# Altium PCB 20230531.PcbDoc
Units mm, origin at the board's own origin, x right, y up, seen from the top; angles counter-clockwise.
Board outline 68.58 x 63.5 mm, 2 copper layers (Top Layer, Bottom Layer); 32 components, 19 nets, 73 pads, 0 vias.
Unrouted connection lines stored in the file: 51.
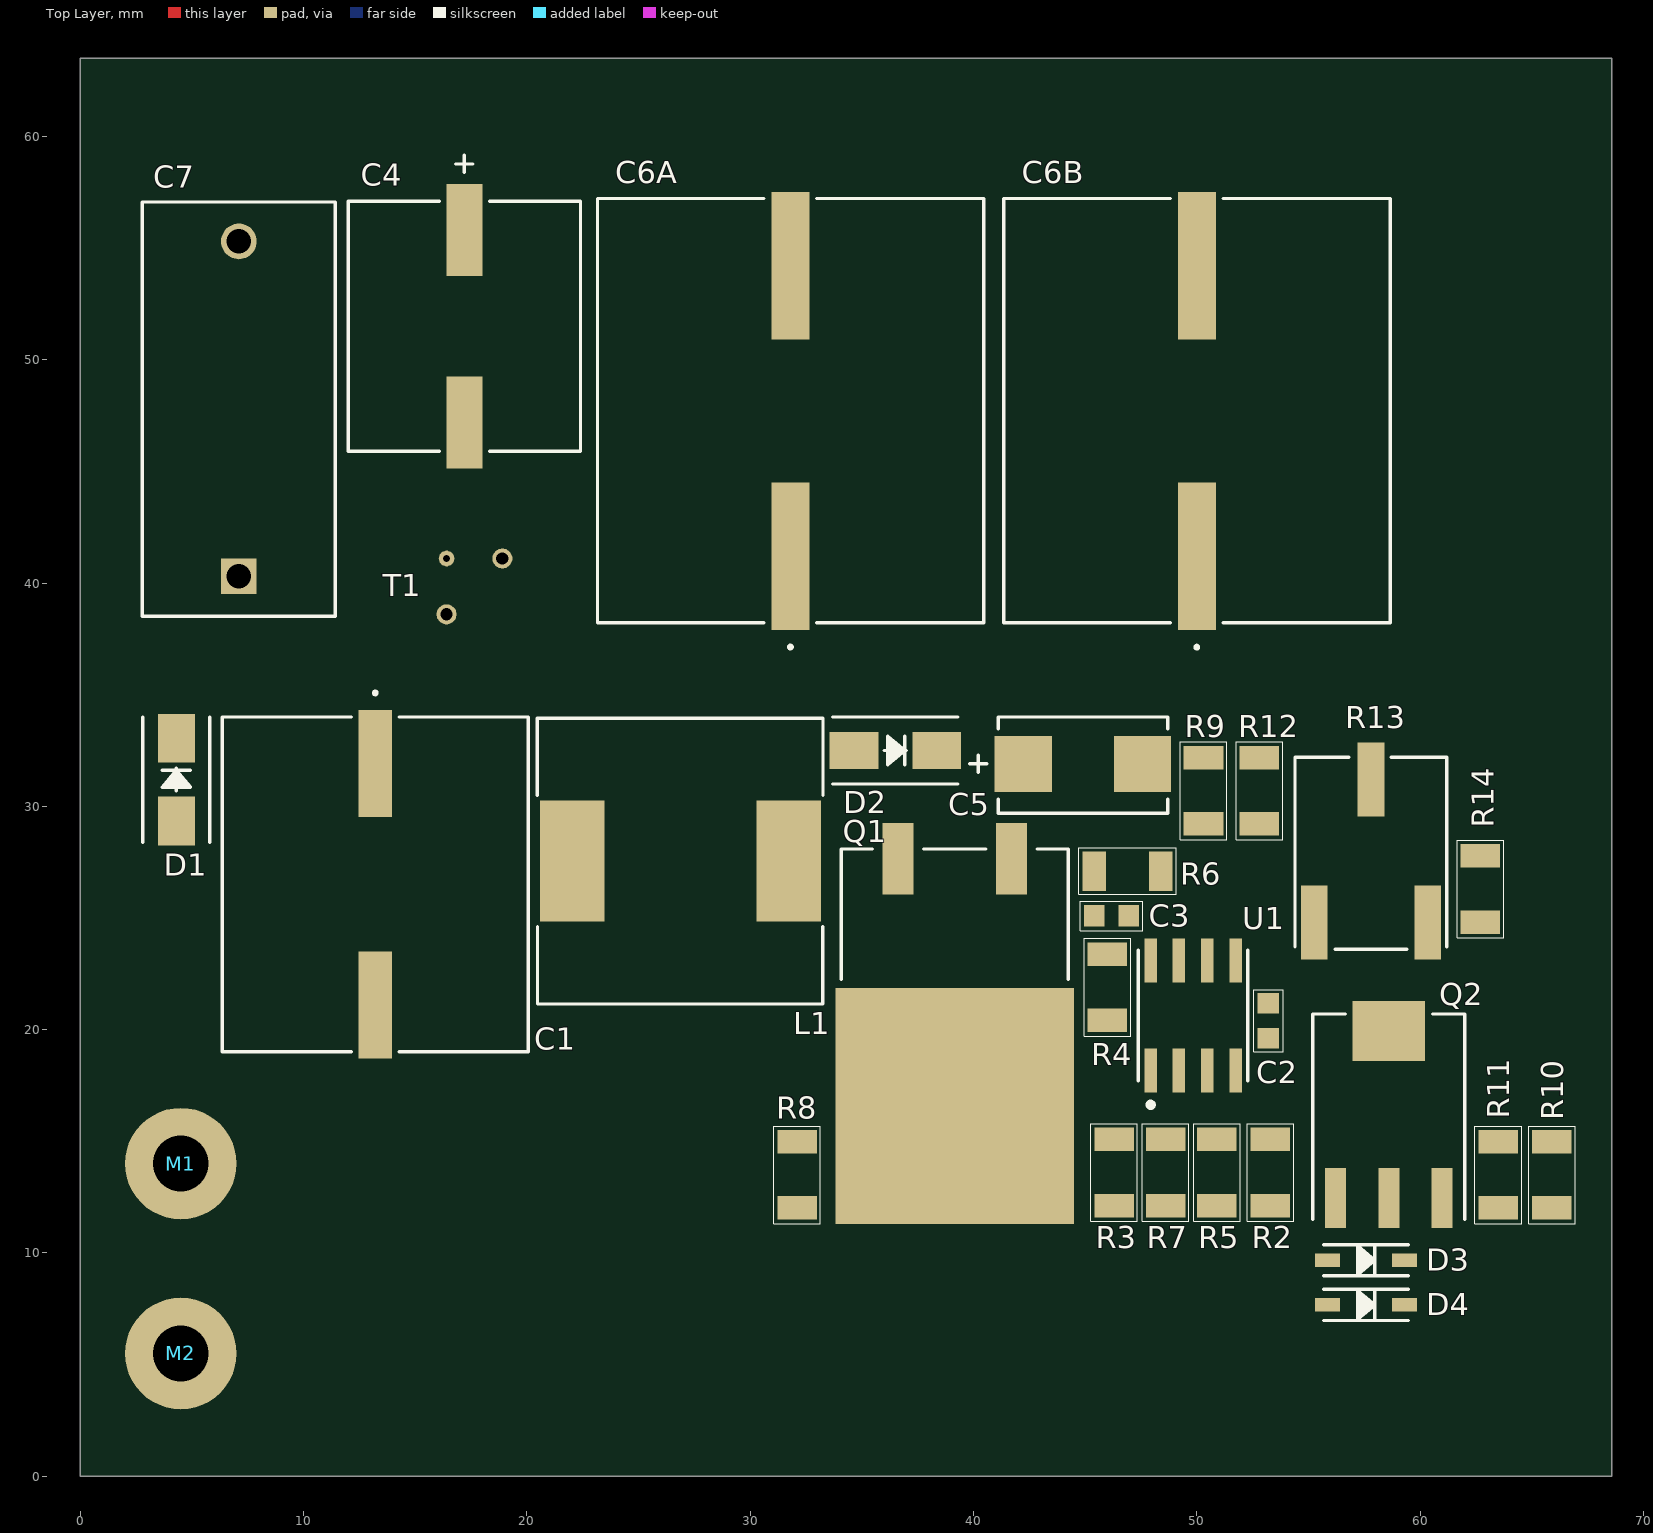
[diagram p0: Top Layer view]
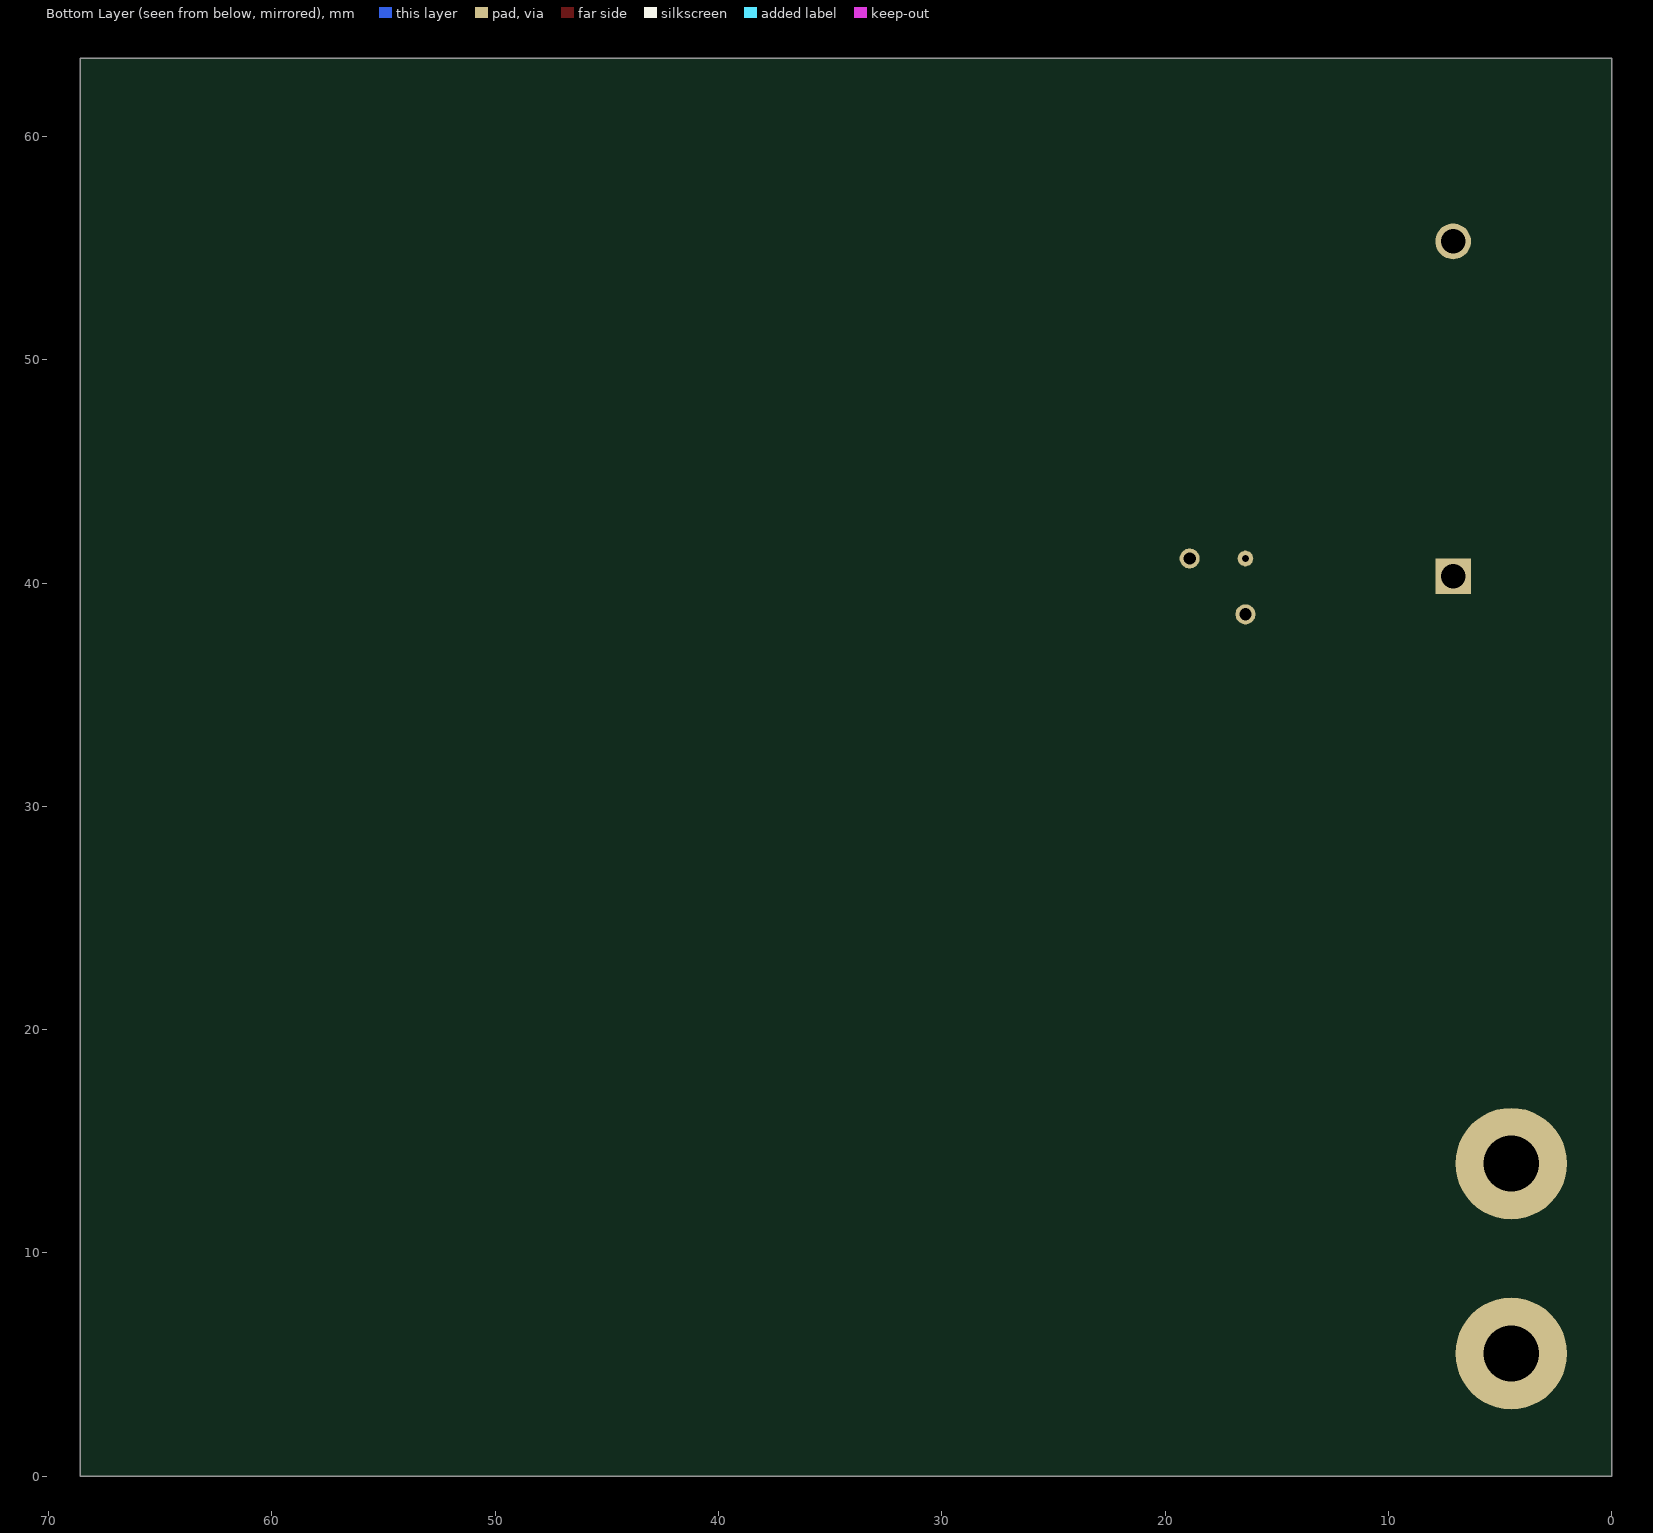
[diagram p1: Bottom Layer view, seen from below]

## Layer stack, top to bottom
Top Solder: solder mask 0.0102, Solder Resist, Dk 3.5
Top Layer: signal copper 0.0356
Dielectric 1: dielectric 0.32, FR-4, Dk 4.8
Bottom Layer: signal copper 0.0356
Bottom Solder: solder mask 0.0102, Solder Resist, Dk 3.5

## Board outline
0,0 68.58,0 68.58,63.5 0,63.5

## Design rules (kind name [scope] priority, off if disabled: settings)
BoardOutlineClearance [All] p1: gap=0.5 ignorepadtopadclearanceinfootprint=FALSE except(0.05: Text-OutlineEdge Text-CavityEdge Text-CutoutEdge Text-SplitBarrior Text-SplitContinuation)
Clearance [All] p1: gap=0.203 ignorepadtopadclearanceinfootprint=TRUE
Height [All] p1: minheight=0 maxheight=254 prefheight=12.7
HoleSize [All] p1: absolutevalues=TRUE maxlimit=25.4 minlimit=0.178 maxpercent=80.000 minpercent=20.000
HoleToHoleClearance [All] p1: gap=0.762 allowstackedmicrovias=TRUE
MinimumAnnularRing [All] p1: minimumring=0.152
MinimumSolderMaskSliver [All] p1: minsoldermaskwidth=0.102
PolygonConnect PolygonConnect_1 [All vs IsNamedPolygon('NONET_L01_P007')] p1: thpad.connectstyle=Direct thpad.reliefconductorwidth=0.254 thpad.reliefentries=4 thpad.polygonreliefangle="90 Angle" thpad.airgapwidth=0.254 smdpad.connectstyle=Relief smdpad.reliefconductorwidth=0.254 smdpad.reliefentries=4 smdpad.polygonreliefangle="90 Angle" smdpad.airgapwidth=0.254 via.connectstyle=Relief via.reliefconductorwidth=0.254 via.reliefentries=4 via.polygonreliefangle="90 Angle" via.airgapwidth=0.254
PolygonConnect [All] p2: connectstyle=Relief reliefconductorwidth=0.254 reliefentries=4 polygonreliefangle="90 Angle" airgapwidth=0.254
RoutingVias [All] p1: holewidth=0.254 width=0.508 viastyle="Through Hole" minholewidth=0.254 minwidth=0.508 maxholewidth=25.4 maxwidth=25.4
SilkToSilkClearance [All] p1: silktosilkclearance=0.025
SilkToSolderMaskClearance [IsPad] p1: minsilkscreentomaskgap=0.025 clearancetoexposedcopper=TRUE
SolderMaskExpansion [All] p1: expansion=0.102 istentingtop=FALSE
UnRoutedNet [All] p1: checkbadconnections=TRUE
ViasUnderSMD [All] p1: allowed=TRUE
Width [All] p1: maxlimit=25.4 minlimit=0.203 preferedwidth=0.254
23 further rules are at their usual default settings.

## Components (designator, comment, footprint, x,y, rotation, side; value= is the part's Value field where it differs from the comment)
C1 "68uF" CAP_POL_13.5_13.5 14,26.4 r270 top
C2 "4700pF" CAP_0603 53.2,20.4 r90 top
C3 ".01uF" CAP_0603 46.175,25.1 r180 top
C4 "300uF" CAP_POL_10.3_10.3 17.2,51.5 r270 top
C5 "22uF" CAP_POL_2917 44.9,31.9 r0 top
C6A "47uF" CAP_POL_16.3_16.3 31.8,47.7 r90 top
C6B "47uF" CAP_POL_16.3_16.3 50,47.698 r90 top
C7 "0.047uF" CAP_15MM 7.1,47.8 r90 top
D1 "S1B-13-F" DIO_214AC 4.3,31.2 r270 top
D2 "S1G-13-F" DIO_214AC 36.5,32.5 r180 top
D3 "1N4148W-13-F" DIO_SOD123 57.581,9.673 r0 top
D4 "MMSZ4701T1G" DIO_SOD123 57.581,7.673 r0 top
L1 "390uH" IND_12.5_12.5 26.5,27.8 r0 top
M1 "2MM" MOUNTING_HOLE_M2 4.5,14 r0 top
M2 "2MM" MOUNTING_HOLE_M2 4.5,5.5 r0 top
Q1 "IRF730ASPBF" FET_TO-263-3 39.16,22.123 r180 top
Q2 "BCP56T1G" TRANS_SOT-223 58.6,16.2 r0 top
R2 "200K" RES_1206 53.3,13.6 r270 top
R3 "4.7K" RES_1206 46.3,13.6 r90 top
R4 "18.2K" RES_1206 46,21.9 r90 top
R5 "1K" RES_1206 50.9,13.6 r270 top
R6 "22" RES_1206 46.9,27.1 r180 top
R7 "560K" RES_1206 48.6,13.6 r270 top
R8 "0.75" RES_1206 32.1,13.5 r270 top
R9 "150" RES_1206 50.3,30.7 r90 top
R10 "8.2K" RES_1206 65.9,13.5 r90 top
R11 "100" RES_1206 63.5,13.5 r90 top
R12 "120K" RES_1206 52.8,30.7 r90 top
R13 "25K" POT_ 57.8,31.2 r0 top
R14 "150K" RES_1206 62.7,26.3 r270 top
T1 "COMP-0433" XFMR_Custom2 16.4,41.1 r0 top
U1 "UC3845BVD1R2G" IC_8_SOIC 49.835,20.636 r90 top

## Footprints (in the part's own frame and the unit in brackets; to place one, negate y for a bottom-side part, rotate by r counter-clockwise, add the part's x,y. Pads: shape width x height; smd on the part's side, far side on the other; paste and mask are expansions set on the pad)
CAP_15MM [mil]
  rect 63x63 hole 43: 1(-295.28,0)
  round 63 hole 43: 2(295.28,0)
  silkscreen extent -365,-170 365,170, body extent -364,-167 364,167, height 571
CAP_0603 [mm]
  rect 0.92x0.98 smd: 1(-0.775,0) 2(0.775,0)
  silkscreen extent -1.4,-0.66 1.4,0.66, body extent -0.8,-0.39 0.8,0.41, height 0.45
CAP_POL_10.3_10.3 [mil]
  rect 162x63 smd: 1(-169.5,0) 2(169.5,0)
  silkscreen extent -301,-205 220,205, body extent -222,-203 222,203, height 415
CAP_POL_13.5_13.5 [mil]
  rect 189x59 smd paste+0: 1(-217.25,-31.18) 2(208.75,-31.18)
  silkscreen extent -345,-301 291,239, body extent -300,-301 291,238, height 553
CAP_POL_16.3_16.3 [mil]
  rect 260x67 smd: 1(-256,0) 2(256,0)
  silkscreen extent -419,-341 375,340, body extent -374,-339 374,339, height 671
CAP_POL_2917 [mm]
  rect 2.56x2.5 smd: 1(-2.672,0) 2(2.672,0)
  silkscreen extent -5.06,-2.2 3.8,2.1, body extent -3.8,-2.15 3.8,2.15, height 3.15
DIO_214AC [mil]
  rect 86x65 smd: 1(-73,0) 2(73,0)
  silkscreen extent -110,-59 110,59, body extent -110,-58 110,58, height 108
DIO_SOD123 [mm]
  rect 1.111x0.601 smd: 1(-1.725,0) 2(1.725,0)
  silkscreen extent -1.9,-0.7 1.9,0.7, body extent -1.92,-0.67 1.92,0.67, height 0.81
FET_TO-263-3 [mil]
  rect 55x126 smd paste+0: 1(-100,-218) 2(100,-218)
  rect 420x416 smd paste+0: 3(0,218)
  silkscreen extent -200,-235 200,-5, body extent -200,-235 200,365, height 190
IC_8_SOIC [mil]
  rect 78x22 smd: 1(-97,75) 2(-97,25) 3(-97,-25) 4(-97,-75) 5(97,-75) 6(97,-25) 7(97,25) 8(97,75)
  silkscreen extent -161,-96 115,96, body extent -118,-96 118,96, height 69
IND_12.5_12.5 [mil]
  rect 114x213 smd: 1(-176.24,-9.84) 2(205.76,-9.84)
  silkscreen extent -238,-262 266,242, body extent -237,-262 267,242, height 315
MOUNTING_HOLE_M2 [mm]
  round 5 hole 2.5: 1(0,0)
POT_ [mm]
  rect 1.2x3.3 smd: 1(0,0) 2(-2.54,-6.4) 3(2.54,-6.4)
  silkscreen extent -3.4,-7.6 3.4,1, body extent -3.35,-7.57 3.35,0.96, height 5.84
RES_1206 [mm]
  rect 1.05x1.77 smd: 1(-1.485,0) 2(1.485,0)
  silkscreen extent -2.18,-1.04 2.18,1.04, body extent -1.6,-0.8 1.6,0.8, height 0.6
TRANS_SOT-223 [mil]
  rect 37x106 smd: 1(-94,-147) 2(0,-147) 3(94,-147)
  rect 128x106 smd: 4(0,147)
  silkscreen extent -134,-185 134,177, body extent -131,-186 131,179, height 68
XFMR_Custom2 [mm]
  round 0.7 hole 0.3: 1(0,0)
  round 0.9 hole 0.55: 2(0,-2.5) 3(2.5,0)

## Part data
C1: library part COMP-0413, "CAP, 68uF, 100V, 20%, AL", Manufacturer="Panasonic Electronic Components", MPN=EEE-FK2A680AQ
C2: library part COMP-0411, "CAP, 4700pF, 50V, 1%, X5R, 0603", Manufacturer="TDK Corporation", MPN=CGA3E2C0G1H472J080AA
C3: library part COMP-0006, "CAP, 0.01uF, 50V, 10%, X7R, 0603", Manufacturer="Samsung Electro-Mechanics", MPN=CL10B103KB8NNNL
C4: library part COMP-0335, "CAP, 330uF, 35V, RAD 10.3mm x 10.3mm", Manufacturer=KEMET, MPN=A771MS337M1VLAS014
C5: library part COMP-0412, "CAP, 22uF, 50V, 20%, TANT", Manufacturer=KEMET, MPN=T491X226M050AT
C6A C6B: library part COMP-0420, "CAP, 47uF, 250V, 20%, AL", Manufacturer=KEMET, MPN=EDH476M250A9TAA
C7: library part COMP-0422, "CAP, 0.047uF, 630V, 15MM", Manufacturer=KEMET, MPN=R76PI24705050J
D1: library part COMP-0415, "DIO, 100V, 1A", Manufacturer="Diodes Incorporated", MPN=S1B-13-F
D2: library part COMP-0416, "DIO, 400V, 1A", Manufacturer="Diodes Incorporated", MPN=S1G-13-F
D3: library part COMP-0421, "DIO, 100V, 300mA", Manufacturer="Diodes Incorporated", MPN=1N4148W-13-F
D4: library part COMP-0417, "DIO, ZENER, 14V", Manufacturer=onsemi, MPN=MMSZ4701T1G
L1: library part COMP-0419, "IND, 390uH, 1A", Manufacturer="Bourns Inc.", MPN=SRR1280-391K
M1 M2: library part MT_M2, "Mounting hole, size M2"
Q1: library part COMP-0418, "TRANS, N-CH,  400V, 5.5A, 74W", Manufacturer="Vishay Siliconix", MPN=IRF730ASPBF
Q2: library part COMP-0414, "TRANS, NPN, 80V, 1A", Manufacturer=onsemi, MPN=BCP56T1G
R2: library part COMP-0407, "RES, 200KOHM, 1%, 1/4W, 1206", Manufacturer=YAGEO, MPN=RC1206FR-07200KL
R3: library part COMP-0402, "RES, 4.7KOHM, 1%, 1/4W, 1206", Manufacturer=YAGEO, MPN=RC1206FR-134K7L
R4: library part COMP-0405, "RES, 18.2KOHM, 1%, 1/4W, 1206", Manufacturer=YAGEO, MPN=RC1206FR-0718K2L
R5: library part COMP-0400, "RES, 1KOHM, 1%, 1/4W, 1206", Manufacturer=YAGEO, MPN=RC1206FR-071KL
R6: library part COMP-0403, "RES, 22OHM, 1%, 1/4W, 1206", Manufacturer=YAGEO, MPN=RC1206FR-1022RL
R7: library part COMP-0404, "RES, 560KOHM, 1%, 1/4W, 1206", Manufacturer=YAGEO, MPN=RC1206FR-07560KL
R8: library part COMP-0410, "RES, 0.75OHM, 1%, 1W, 1206", Manufacturer=YAGEO, MPN=PE1206FRF470R75L
R9: library part COMP-0409, "RES, 150OHM, 1%, 1/2W, 1206", Manufacturer="Vishay Dale", MPN=CRCW1210150RFKEA
R10: library part COMP-0408, "RES, 8.2KOHM, 1%, 1/4W, 1206", Manufacturer=YAGEO, MPN=RC1206FR-078K2L
R11: library part COMP-0399, "RES, 100OHM, 1/4W, 1%, 1206", Manufacturer=YAGEO, MPN=RC1206FR-13100RL
R12: library part COMP-0401, "RES, 120KOHM, 1%, 1/4W, 1206", Manufacturer=YAGEO, MPN=RC1206FR-07120KL
R13: library part COMP-0434, "POT, 25KOHM", Manufacturer="Bourns Inc.", MPN=3361P-1-253GLF
R14: library part COMP-0406, "RES, 150KOHM, 1%, 1/4W, 1206", Manufacturer=YAGEO, MPN=RC1206FR-07150KL
T1: "XFMR, TRIGGER"
U1: library part COMP-0398, "IC, POWER MGMT, BOOST REGULATOR, 30V, 105C, SOIC-8", Manufacturer=onsemi, MPN=UC3845BVD1R2G

## Nets (pads, with @x,y where several pads share a name; then routed paths per layer and width w, separated by ;. In a path a pad name is that pad's centre, name@x,y a point inside that pad or via, vN(x,y) a via of type N, cw(c..) or ccw(c..) an arc to the next point about the centre after c; other vN are vias at no path point)
CS: R2.1 R5.1 U1.3
FB: R3.2 R7.1 U1.2
GND: C1.2 C2.2 C3.2 C4.2 D4.2 M2.1 R3.1 R8.1 U1.5
NetC2_1: C2.1 R4.1 U1.4
NetC5_1: C5.1 D2.1 R9.1
NetC5_2: C5.2 C6A.1 C6B.1 R7.2 R9.2 R12.2
NetC7_1: C7.1 R13.2 T1.1
NetD2_2: D2.2 L1.2 Q1.2
NetD3_1: D3.1 D4.1 Q2.1 R10.1
NetQ1_1: Q1.1 R6.2
NetQ1_3: Q1.3 R5.2 R8.2
NetQ2_3: Q2.3 R11.1
NetR12_1: R12.1 R13.1
NetR13_3: R13.3 R14.2
PH: R6.1 U1.6
VCC: C4.1 C6A.2 C6B.2 C7.2 D3.2 Q2.2 R14.1 T1.2 U1.7
VIN: D1.2 M1.1
VIN_D: C1.1 D1.1 L1.1 R2.2 R10.2 R11.2
VREF: C3.1 R4.2 U1.8
pads on no net: Q2.4 T1.3 U1.1